# Altium PCB ES_Class6C_2L.PcbDoc
Units mm, origin at the board's own origin, x right, y up, seen from the top; angles counter-clockwise.
Board outline 55 x 55 mm, 2 copper layers (Top Layer, Bottom Layer), stack 1.586 mm thick; 71 components, 24 nets, 188 pads, 107 vias.
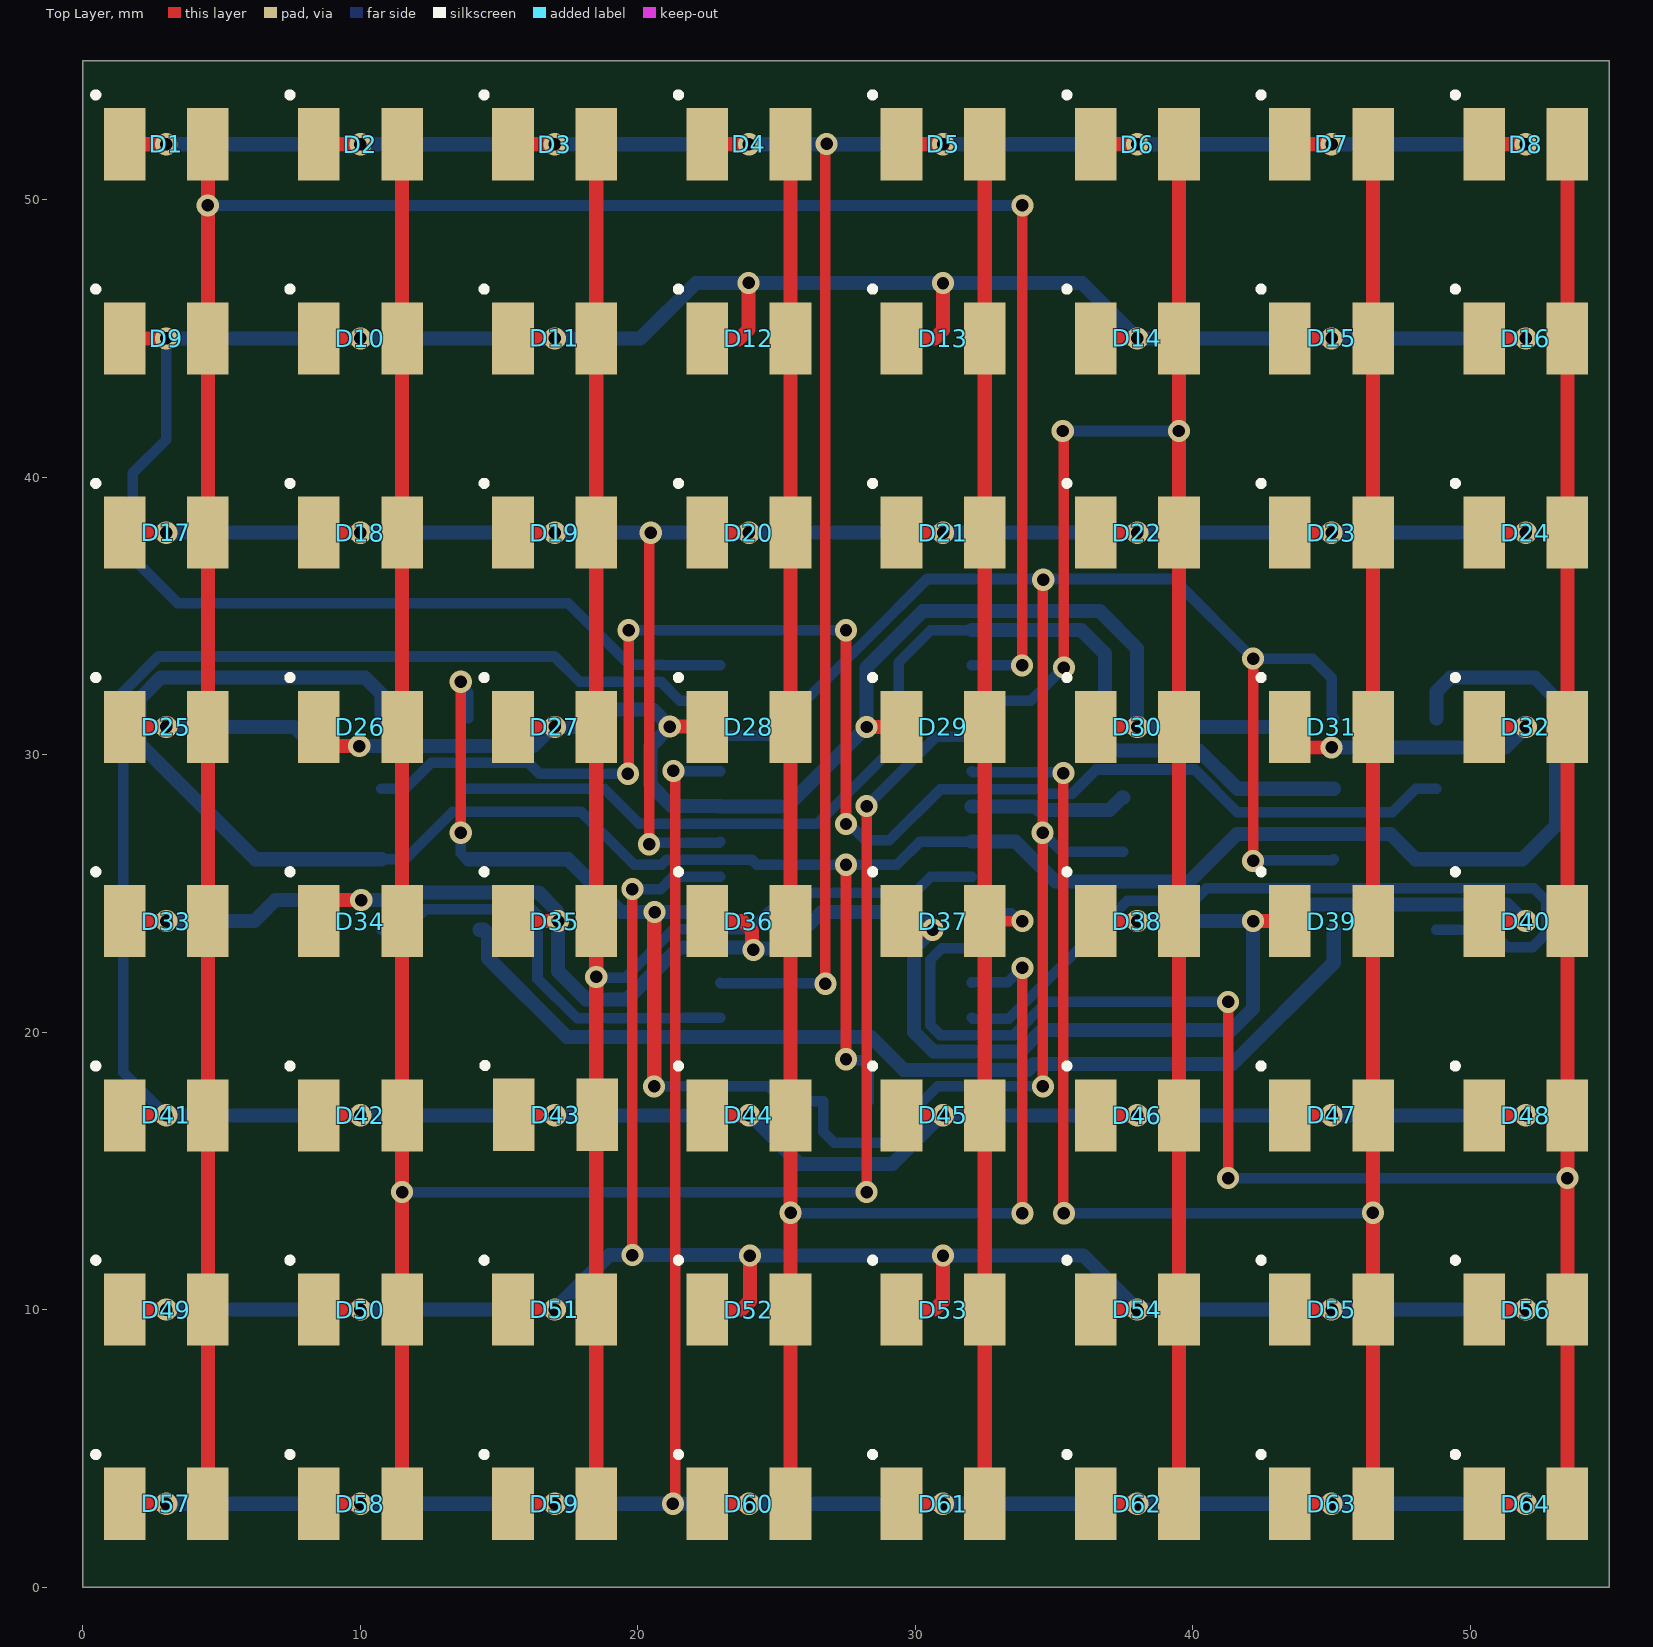
[diagram p0: Top Layer view]
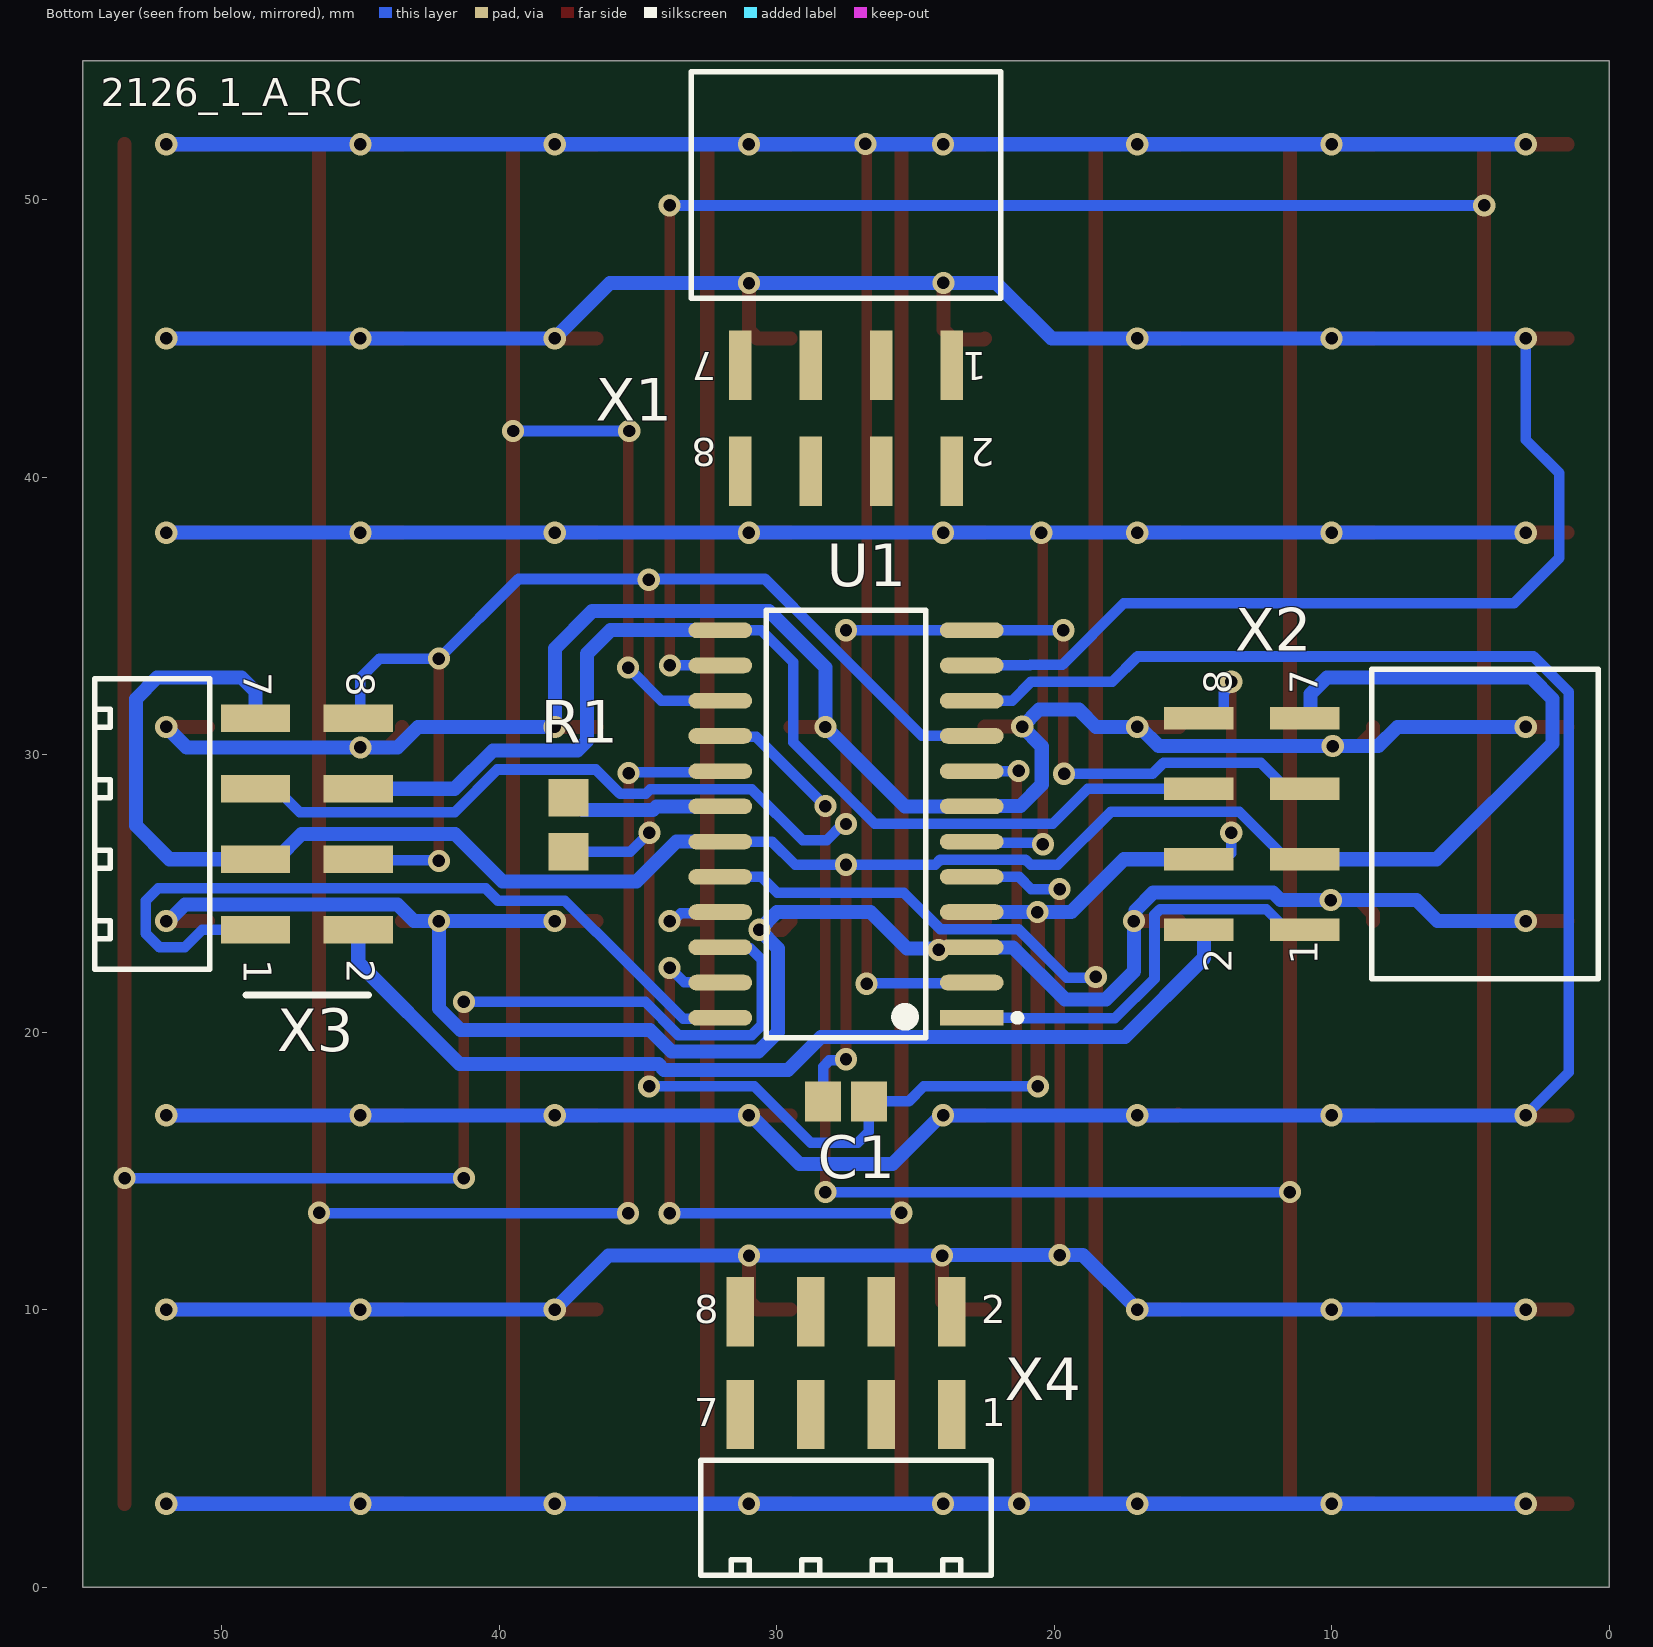
[diagram p1: Bottom Layer view, seen from below]
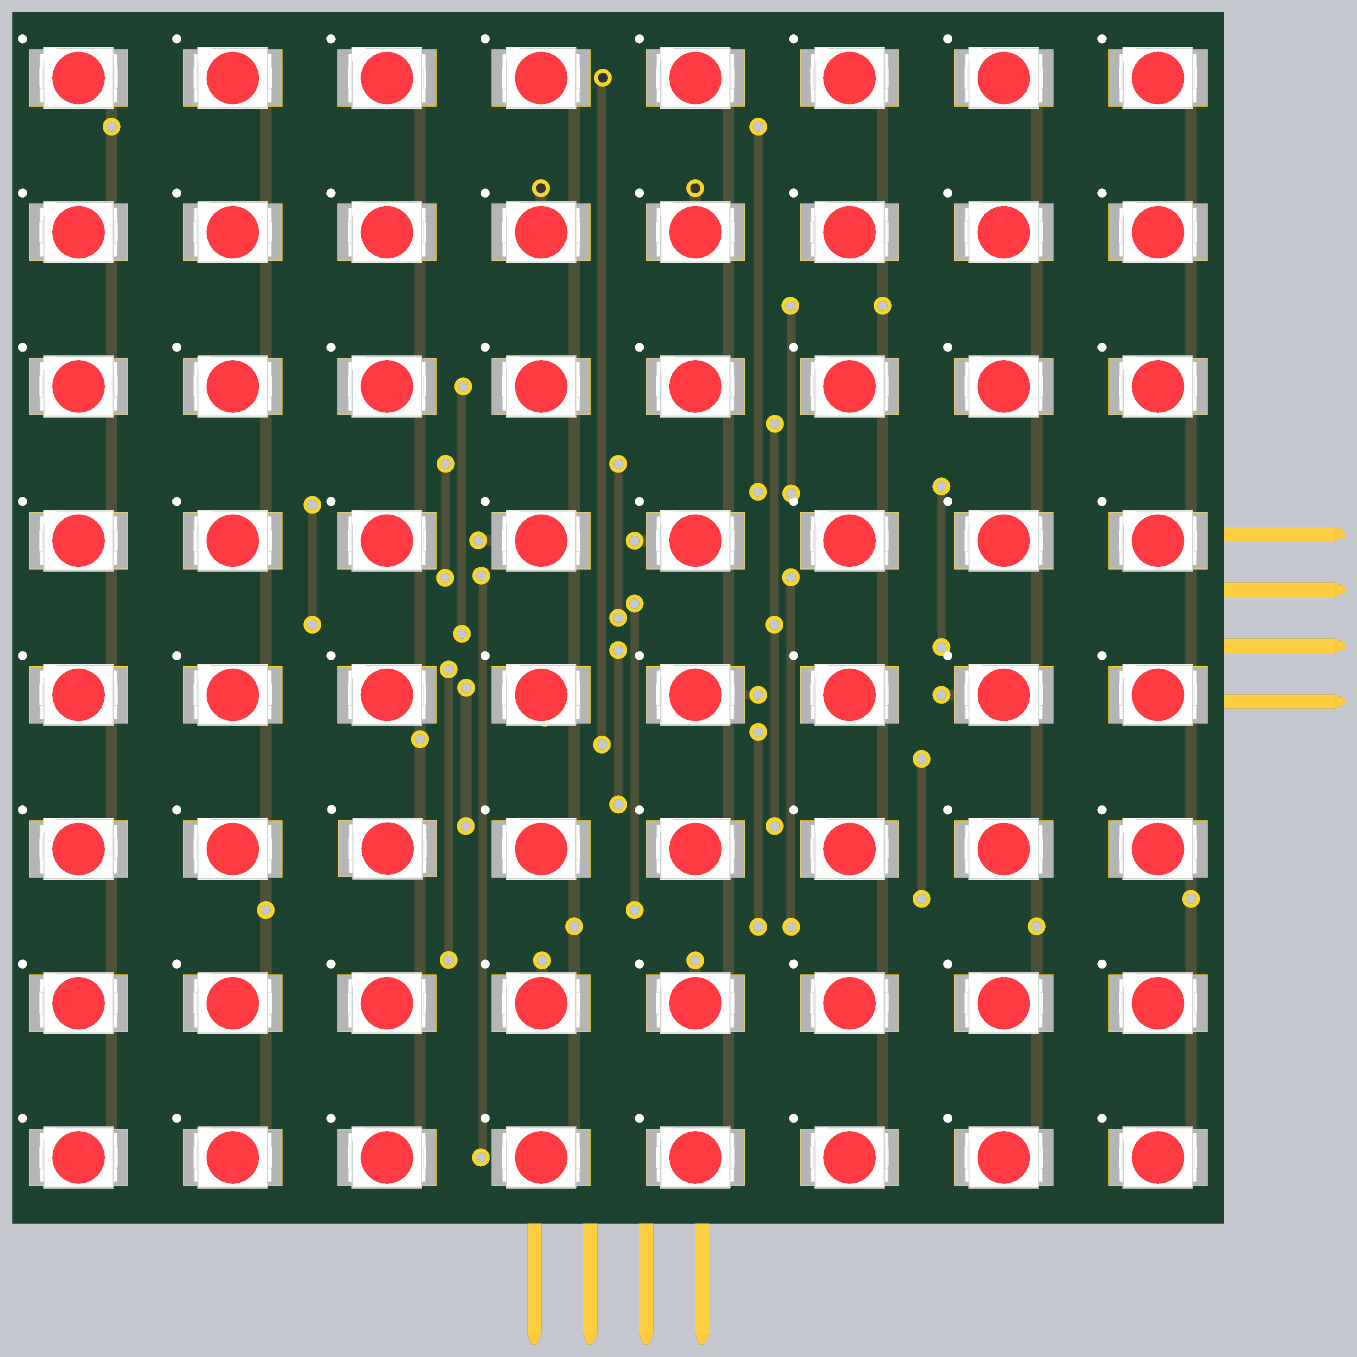
[diagram p2: 3D render of the assembled board from above, using the file's embedded part models]
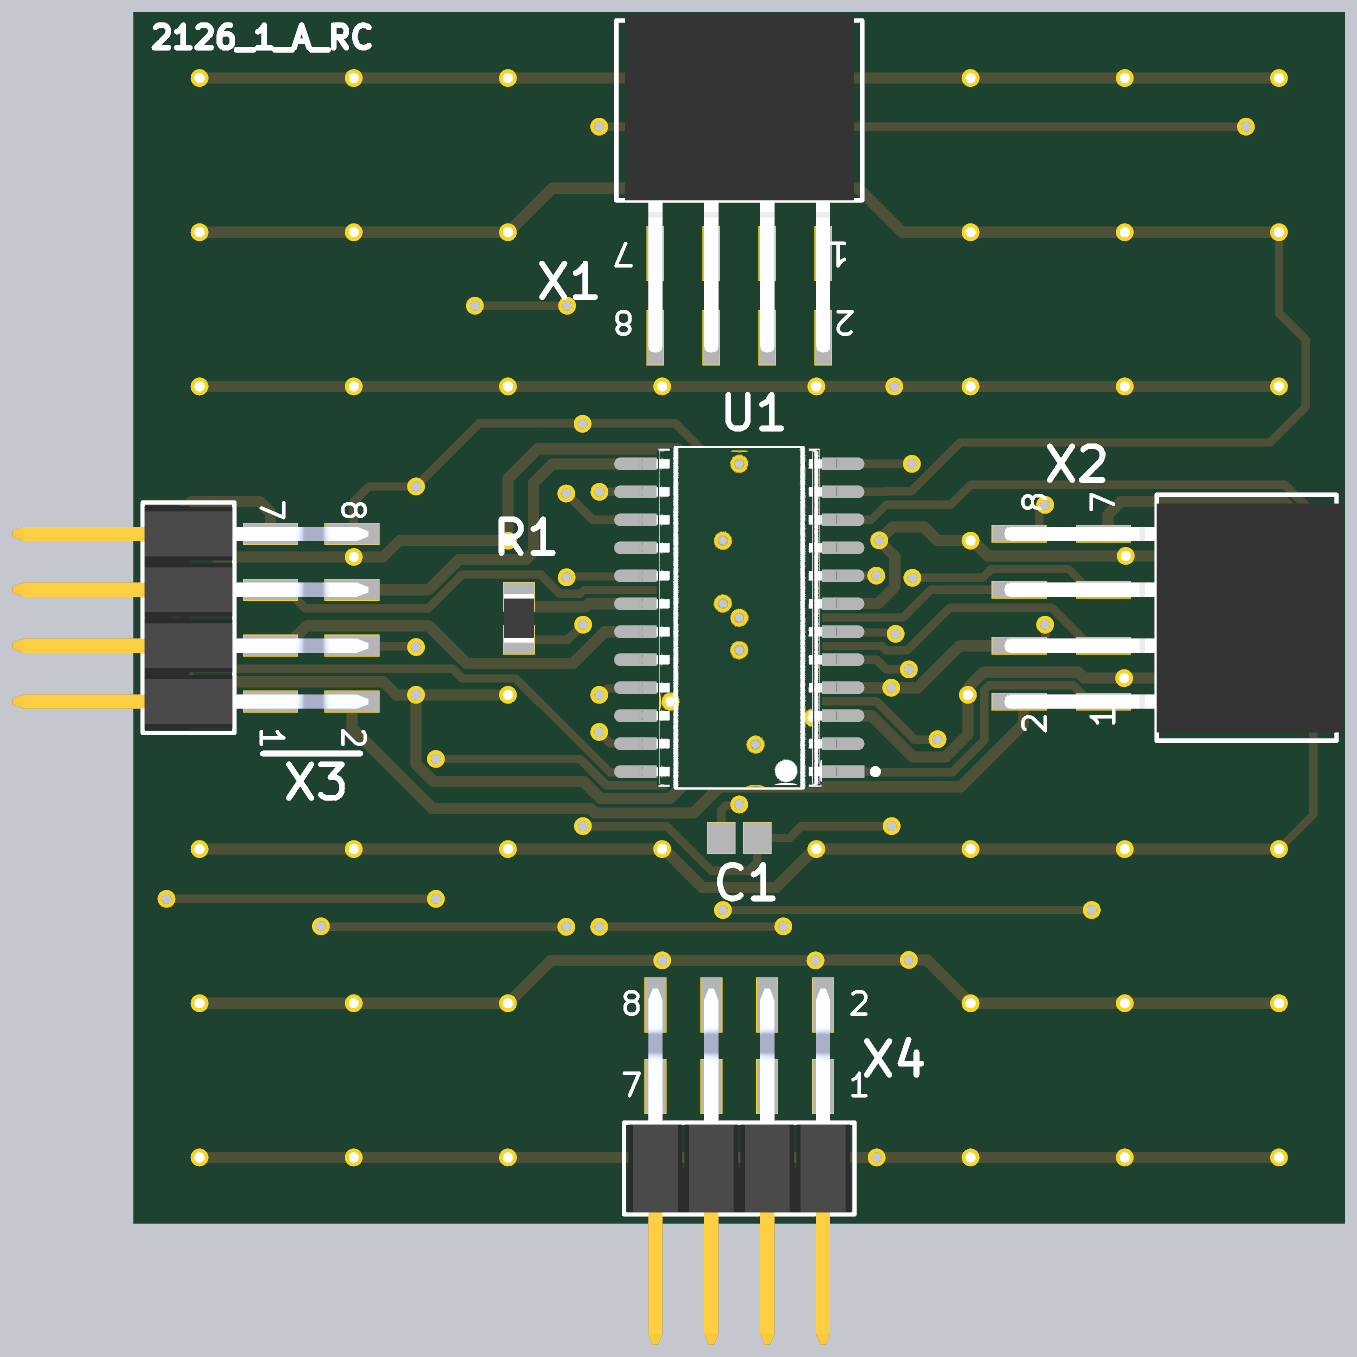
[diagram p3: 3D render of the assembled board from below, using the file's embedded part models]

## Layer stack, top to bottom
Top Solder: solder mask 0.0102, Solder Resist, Dk 3.5
Top Layer: signal copper 0.018
Dielectric1: core 1.55, FR-4, Dk 4.8
Bottom Layer: signal copper 0.018
Bottom Solder: solder mask 0.0102, Solder Resist, Dk 3.5

## Board outline
0,0 0,55 55,55 55,0

## Design rules (kind name [scope] priority, off if disabled: settings)
BoardOutlineClearance [All] p1: gap=0.25 ignorepadtopadclearanceinfootprint=FALSE except(0: Arc-SplitContinuation Track-SplitContinuation SMDPad-SplitContinuation THPad-SplitContinuation Via-SplitContinuation Fill-SplitContinuation Poly-SplitContinuation Region-SplitContinuation Text-SplitContinuation)
Clearance Clearance-xPP-xTP-xTT [All] p1: gap=0.15 ignorepadtopadclearanceinfootprint=FALSE except(0: Arc-Hole Track-Hole SMDPad-Hole THPad-Hole Via-Hole Fill-Hole Poly-Hole Region-Hole Text-Hole)
ComponentClearance [All] p1: gap=0.25 collisioncheckmode=3 verticalgap=0.25 showdistances=FALSE
DiffPairsRouting [All] p1: maxlimit=0.25 minlimit=0.25 mostfreqgap=0.25 toplayer_minwidth=0.381 toplayer_maxwidth=0.381 toplayer_prefwidth=0.381 bottomlayer_minwidth=0.381 bottomlayer_maxwidth=0.381 bottomlayer_prefwidth=0.381 maxuncoupledlength=12.5
Height [All] p1: minheight=0 maxheight=25 prefheight=12.5
HoleSize HoleSize-PTH [All] p1: absolutevalues=TRUE maxlimit=10 minlimit=0.25 maxpercent=80.000 minpercent=20.000
HoleToHoleClearance [All] p1: gap=0.35 allowstackedmicrovias=TRUE
MinimumAnnularRing "Minimum IAR  >0.45mm" [((ObjectKind = 'Pad') OR (ObjectKind = 'Via')) And (Layer = 'MultiLayer') And (HoleDiameter > AsMM(0.45))] p1: minimumring=0.175 // minimum inner annular ring for pads > 0.45mm finished hole size
MinimumAnnularRing "Minimum IAR <=0.45mm" [((ObjectKind = 'Pad') OR (ObjectKind = 'Via')) And (Layer = 'MultiLayer') And (HoleDiameter <= AsMM(0.45))] p2: minimumring=0.175 // minimum inner annular ring for pads <= 0.45mm finished hole size
MinimumSolderMaskSliver [All] p1: minsoldermaskwidth=0.08
PasteMaskExpansion [All] p1: expansion=-0.025
PlaneClearance PlaneClearance-IPI [All] p1: clearance=0.25
PlaneConnect [All] p1: planeconnectstyle=Relief reliefexpansion=0.175 reliefentries=4 reliefconductorwidth=0.2 reliefairgap=0.2
PolygonConnect PolygonConnect-xTW [All] p1: connectstyle=Relief reliefconductorwidth=0.2 reliefentries=4 polygonreliefangle="90 Angle" airgapwidth=0.2
RoomDefinition 2126_1_MatrixBoard_AffichageMatricielNomEtudiant [InComponentClass('2126_1_MatrixBoard_AffichageMatricielNomEtudiant')] p1: confinementstyle=ConfineIn formatcopy=TRUE lockcomponents=FALSE outline -250.5,-211.955 743.085,-211.955 743.085,443.238 -250.5,443.238
RoutingCorners [All] p1: cornerstyle=45-Degree minsetback=2.5 maxsetback=2.5
RoutingVias RoutingViasES [All] p1: holewidth=0.3 width=0.65 viastyle="Through Hole" minholewidth=0.25 minwidth=0.61 maxholewidth=0.45 maxwidth=0.8 // finishet hole size <= 0.45mm
SilkToSilkClearance [All] p1: silktosilkclearance=0.2
SilkToSolderMaskClearance SilkscreenOverComponentPads [IsPad] p1: minsilkscreentomaskgap=0.2 clearancetoexposedcopper=TRUE
SolderMaskExpansion [All] p1: expansion=0 istentingtop=FALSE
UnRoutedNet [All] p1: checkbadconnections=TRUE
Width Width-xTW [All] p1: maxlimit=0.508 minlimit=0.254 preferedwidth=0.381 minimp=50.000000 maximp=50.000000 favimp=50.000000
17 further rules are at their usual default settings.

## Components (designator, comment, footprint, x,y, rotation, side; value= is the part's Value field where it differs from the comment)
C1 "100n" CAPC2013X145X48NL20T23 27.5,17.5 r0 bottom
D1 "RED" SODFL350X210-2N 3,52 r0 top
D2 "RED" SODFL350X210-2N 10,52 r0 top
D3 "RED" SODFL350X210-2N 17,52 r0 top
D4 "RED" SODFL350X210-2N 24,52 r0 top
D5 "RED" SODFL350X210-2N 31,52 r0 top
D6 "RED" SODFL350X210-2N 38,52 r0 top
D7 "RED" SODFL350X210-2N 45,52 r0 top
D8 "RED" SODFL350X210-2N 52,52 r0 top
D9 "RED" SODFL350X210-2N 3,45 r0 top
D10 "RED" SODFL350X210-2N 10,45 r0 top
D11 "RED" SODFL350X210-2N 17,45 r0 top
D12 "RED" SODFL350X210-2N 24,45 r0 top
D13 "RED" SODFL350X210-2N 31,45 r0 top
D14 "RED" SODFL350X210-2N 38,45 r0 top
D15 "RED" SODFL350X210-2N 45,45 r0 top
D16 "RED" SODFL350X210-2N 52,45 r0 top
D17 "RED" SODFL350X210-2N 3,38 r0 top
D18 "RED" SODFL350X210-2N 10,38 r0 top
D19 "RED" SODFL350X210-2N 17,38 r0 top
D20 "RED" SODFL350X210-2N 24,38 r0 top
D21 "RED" SODFL350X210-2N 31,38 r0 top
D22 "RED" SODFL350X210-2N 38,38 r0 top
D23 "RED" SODFL350X210-2N 45,38 r0 top
D24 "RED" SODFL350X210-2N 52,38 r0 top
D25 "RED" SODFL350X210-2N 3,31 r0 top
D26 "RED" SODFL350X210-2N 10,31 r0 top
D27 "RED" SODFL350X210-2N 17,31 r0 top
D28 "RED" SODFL350X210-2N 24,31 r0 top
D29 "RED" SODFL350X210-2N 31,31 r0 top
D30 "RED" SODFL350X210-2N 38,31 r0 top
D31 "RED" SODFL350X210-2N 45,31 r0 top
D32 "RED" SODFL350X210-2N 52,31 r0 top
D33 "RED" SODFL350X210-2N 3,24 r0 top
D34 "RED" SODFL350X210-2N 10,24 r0 top
D35 "RED" SODFL350X210-2N 17,24 r0 top
D36 "RED" SODFL350X210-2N 24,24 r0 top
D37 "RED" SODFL350X210-2N 31,24 r0 top
D38 "RED" SODFL350X210-2N 38,24 r0 top
D39 "RED" SODFL350X210-2N 45,24 r0 top
D40 "RED" SODFL350X210-2N 52,24 r0 top
D41 "RED" SODFL350X210-2N 3,17 r0 top
D42 "RED" SODFL350X210-2N 10,17 r0 top
D43 "RED" SODFL350X210-2N 17.03,17.021 r0 top
D44 "RED" SODFL350X210-2N 24,17 r0 top
D45 "RED" SODFL350X210-2N 31,17 r0 top
D46 "RED" SODFL350X210-2N 38,17 r0 top
D47 "RED" SODFL350X210-2N 45,17 r0 top
D48 "RED" SODFL350X210-2N 52,17 r0 top
D49 "RED" SODFL350X210-2N 3,10 r0 top
D50 "RED" SODFL350X210-2N 10,10 r0 top
D51 "RED" SODFL350X210-2N 17,10 r0 top
D52 "RED" SODFL350X210-2N 24,10 r0 top
D53 "RED" SODFL350X210-2N 31,10 r0 top
D54 "RED" SODFL350X210-2N 38,10 r0 top
D55 "RED" SODFL350X210-2N 45,10 r0 top
D56 "RED" SODFL350X210-2N 52,10 r0 top
D57 "RED" SODFL350X210-2N 3,3 r0 top
D58 "RED" SODFL350X210-2N 10,3 r0 top
D59 "RED" SODFL350X210-2N 17,3 r0 top
D60 "RED" SODFL350X210-2N 24,3 r0 top
D61 "RED" SODFL350X210-2N 31,3 r0 top
D62 "RED" SODFL350X210-2N 38,3 r0 top
D63 "RED" SODFL350X210-2N 45,3 r0 top
D64 "RED" SODFL350X210-2N 52,3 r0 top
R1 "43k" RESC2013X70X40ML20T20 37.5,27.475 r90 bottom value=10k
U1 "MAX7221CWG+" FP-W24-1-IPC_B 27.5,27.5 r0 bottom
X1 "610108249221" 610108249221 27.5,50.8 r0 bottom
X2 "610108249221" 610108249221 4.2,27.5 r90 bottom
X3 "610108249121" 610108249121 52.5,27.5 r270 bottom
X4 "610108249121" 610108249121 27.5,2.5 r180 bottom

## Footprints (in the part's own frame and the unit in brackets; to place one, negate y for a bottom-side part, rotate by r counter-clockwise, add the part's x,y. Pads: shape width x height; smd on the part's side, far side on the other; paste and mask are expansions set on the pad)
610108249121 [mm] "Pin Header, pitch 2.54 mm, SMD, Angled, dual row, 8p"
  rect 1x2.5 smd: 1(3.81,3.72) 2(3.81,7.42) 3(1.27,3.72) 4(1.27,7.42) 5(-1.27,3.72) 6(-1.27,7.42) 7(-3.81,3.72) 8(-3.81,7.42)
  silkscreen extent -5.23,-2.07 5.23,2.07, body extent -5.08,-8 5.08,8.16, height 5.1
610108249221 [mm] "Socket Header, Pitch 2.54 mm, SMT, Angled, dual row, 8p"
  rect 0.8x2.5 smd: 1(-3.81,6.76) 2(-3.81,10.59) 3(-1.27,6.76) 4(-1.27,10.59) 5(1.27,6.76) 6(1.27,10.59) 7(3.81,6.76) 8(3.81,10.59)
  silkscreen extent -5.58,-3.81 5.58,4.35, body extent -5.22,-4.15 5.2,11.25, height 5.03
CAPC2013X145X48NL20T23 [mm] "Chip Capacitor, 2-Leads, Body 2.00x1.25mm, IPC Medium Density"
  rect 1.3x1.45 smd: 1(-0.825,0) 2(0.825,0)
  body extent -1.1,-0.72 1.1,0.72, height 1.45
FP-W24-1-IPC_B [mm]
  rect 2.298x0.567 smd paste+0 mask+0: 1(-4.528,6.985)
  rrect100% 2.298x0.567 smd paste+0 mask+0: 2(-4.528,5.715) 3(-4.528,4.445) 4(-4.528,3.175) 5(-4.528,1.905) 6(-4.528,0.635) 7(-4.528,-0.635) 8(-4.528,-1.905) 9(-4.528,-3.175) 10(-4.528,-4.445) 11(-4.528,-5.715) 12(-4.528,-6.985) 13(4.528,-6.985) 14(4.528,-5.715) 15(4.528,-4.445) 16(4.528,-3.175) 17(4.528,-1.905) 18(4.528,-0.635) 19(4.528,0.635) 20(4.528,1.905) 21(4.528,3.175) 22(4.528,4.445) 23(4.528,5.715) 24(4.528,6.985)
  silkscreen extent -6.3,-7.7 2.88,7.7, body extent -5.16,-7.7 5.16,7.7, height 2.66
RESC2013X70X40ML20T20 [mm] "Chip Resistor, 2-Leads, Body 2.2x1.35mm, IPC Low Density"
  rect 1.35x1.45 smd: 1(-0.975,0) 2(0.975,0)
  body extent -1.1,-0.68 1.1,0.67, height 0.7
SODFL350X210-2N [mm] "SODFL, 2-Leads, Body 3,00x3,50mm, IPC Medium Density"
  rect 1.5x2.6 smd: A(1.5,0) K(-1.5,0)
  silkscreen extent -2.64,1.68 -2.44,1.88, body extent -1.78,-1.4 1.78,1.4, height 1.8

## Part data
C1: library part CMP-2007-03167-1, "VJ0805Y104KNAAT", Manufacturer=Vitramon, Manufacturer 1="Vishay Vitramon", Manufacturer Part Number 1=VJ0805Y104KNAAT, Part Number=VJ0805Y104KNAAT
D1 D2 D3 D4 D5 D6 D7 D8 D9 D10 D11 D12 D13 D14 D15 D16 D17 D18 D19 D20 D21 D22 D23 D24 D25 D26 D27 D28 D29 D30 D31 D32 D33 D34 D35 D36 D37 D38 D39 D40 D41 D42 D43 D44 D45 D46 D47 D48 D49 D50 D51 D52 D53 D54 D55 D56 D57 D58 D59 D60 D61 D62 D63 D64: library part 151031VS04000, "WL-TMRC THT Mono-color Round Color, size 3mm, Bright Green, 2.1V, 40deg", Emitting Color="Bright Green", Forward Voltage=2.1V, Operating Temperature="-40 to +85degC", Chip Technology=AlInGaP, ComponentLink1Description=Manufacturer, ComponentLink1URL=http://www.we-online.de, ComponentLink2Description=Datasheet, ComponentLink2URL=https://katalog.we-online.de/led/datasheet/151031VS04000.pdf, Dominant Wavelength=570nm, Luminous Intensity=120mcd, Mounting Technology=THT, Packaging=Bulk, Part Number=151031VS04000, Peak Wavelength=573nm, Published Date="January 2021", Publisher="Wurth Elektronik", Size=3mm, Viewing Angle=40deg
R1: library part CMP-1013-00623-1, "10K 0.125W 1% 0805 (2012 Metric)  SMD", Case-EIA=0805, Case-Metric=2012, Manufacturer 1="Vishay Dale", Manufacturer 2=Yageo, Manufacturer 5=Bourns, Manufacturer 6=Rohm, Manufacturer 7=Vishay, Manufacturer 10=Panasonic, Manufacturer Part Number 1=CRCW080510K0FKEC, Manufacturer Part Number 2=RC0805FR-0710KL, Manufacturer Part Number 3=CRCW080510K0FKTC, Manufacturer Part Number 4=CRCW080510K0FKEB, Manufacturer Part Number 5=CR0805-FX-1002ELF, Manufacturer Part Number 6=MCR10EZPF1002, Manufacturer Part Number 7=CRCW080510K0FKEA, Manufacturer Part Number 8=CRCW080510K0FKTB, Manufacturer Part Number 9=CRCW080510K0FKTA, Manufacturer Part Number 10=ERJ-6ENF1002V, Power="0.125 W", Supplier Part Number 1=541-10.0KCCT-ND, Tolerance="1 %", Manufacturer 3="Vishay Dale", Manufacturer 4="Vishay Dale", Manufacturer 8="Vishay Dale", Manufacturer 9="Vishay Dale", Supplier 1=Digi-Key, Technology=SMT
U1: library part CMP-05718-000002-1, "IC DRVR 7 SEGMNT 8 DIGIT 24SOIC", Manufacturer="Maxim Integrated", Max Junction Temp=+150°C, Max Power Dissipation=941mW, Max Supply Voltage=5.5V, Min Supply Voltage=4V, Nominal Supply Current=330mA, Package=W24-1, Temperature="0°C to +70°C", Temperature Range High=+70°C, Temperature Range Low=0°C, Automotive=No, Category=IC, ComponentLink2Description=Datasheet, ComponentLink2URL=https://datasheets.maximintegrated.com/en/ds/MAX7219-MAX7221.pdf, Device Class L1="Integrated Circuits (ICs)", Device Class L2="Power Management ICs", Device Class L3="LED Drivers", Digikey Description="IC DRVR 7 SEGMNT 8 DIGIT 24SOIC", Footprint Url=https://pdfserv.maximintegrated.com/land_patterns/90-0182.PDF, Height=2.65mm, Ipc Land Pattern Name=SOIC127P1032X250-24, Lead Free=Yes, Manufacturer Part Number=MAX7221CWG+, Mouser Description="In a Tube of 30, Maxim MAX7221CWG+, LED Driver, 8-Digits 64-Segments, 5 V, 24-Pin SOIC W", Number Of Outputs=8, Octopart=https://octopart.com/max7221cwg%2B-maxim+integrated-39581478, RoHS=TRUE, Standoff Height=0.1mm
X1 X2: "WR-PHD Socket Header, THT, pitch 2.54mm, Dual Row, Angled, 8p", Contact Resistance=20mOhm, Manufacturer="Wurth Elektronik", Manufacturer Part Number=613008243121, Operating Temperature="-40 to +125degC", Rated Current=3A, Withstanding Voltage=500VAC, Working Voltage=250VAC, ComponentLink1Description=Manufacturer, ComponentLink1URL=http://www.we-online.de, ComponentLink2Description=Datasheet, ComponentLink2URL=https://www.we-online.com/catalog/datasheet/613008243121.pdf, Gender="Socket Header", Mounting Technology=THT, Orientation=Angled, Packaging=Tray, Pin Number=8, Pitch=2.54mm, Row Number=Dual
X3 X4: "WR-PHD Pin Header, THT, pitch 2.54mm, Dual Row, Angled, 8p", Contact Resistance=20mOhm, Manufacturer="Wurth Elektronik", Manufacturer Part Number=61300821021, Operating Temperature="-40 to +105degC", Rated Current=3A, Withstanding Voltage=500VAC, Working Voltage=250VAC, ComponentLink1Description=Manufacturer, ComponentLink1URL=http://www.we-online.de, ComponentLink2Description=Datasheet, ComponentLink2URL=https://www.we-online.com/catalog/datasheet/61300821021.pdf, Gender="Pin Header", Mounting Technology=THT, Orientation=Angled, Packaging=Bag, Pin Number=8, Pitch=2.54mm, Row Number=Dual

## Via types
v1: diameter 0.8, hole 0.45, Top Layer to Bottom Layer, 107 vias

## Nets (pads, with @x,y where several pads share a name; then routed paths per layer and width w, separated by ;. In a path a pad name is that pad's centre, name@x,y a point inside that pad or via, vN(x,y) a via of type N, cw(c..) or ccw(c..) an arc to the next point about the centre after c; other vN are vias at no path point)
+5: C1.2 U1.19 X2.3 X2.7 X3.3 X3.7 | length 88.3
  Top Layer w0.381: v1(27.5,19.024) v1(27.5,26.03)
  Bottom Layer w0.381: X2.3@10.76,26.23 11.61,26.23 13.328,27.948 17.949,27.948 19.867,26.03 20.847,26.03 21.036,26.219 24.096,26.219 24.285,26.03 v1(27.5,26.03) 29.332,26.03 30.167,26.865 U1.19 ; v1(27.5,19.024) 27.546,18.978 28.102,18.978 28.325,18.755 C1.2
  Bottom Layer w0.508: X2.7@10.755,31.315 10.755,32.187 10.168,32.774 2.802,32.774 2.04,32.012 2.04,30.408 6.218,26.23 X2.3@10.76,26.23 ; U1.19 33.603,26.865 35.047,25.421 39.883,25.421 41.596,27.134 47.126,27.134 48.03,26.23 X3.3 51.884,26.23 53.094,27.44 53.094,32.012 52.332,32.774 49.284,32.774 48.784,32.274 48.784,31.314 X3.7
/SS1: U1.12 X2.5 X3.5 | length 53.1
  Top Layer w0.381: v1(19.641,29.313) 19.663,29.335 v1(19.663,34.485) ; v1(27.5,27.5) v1(27.5,34.485)
  Bottom Layer w0.381: X2.5@10.76,28.77 11.61,28.77 12.551,29.711 16.056,29.711 16.454,29.313 v1(19.641,29.313) ; v1(19.663,34.485) U1.12 v1(27.5,34.485) ; v1(27.5,27.5) 27.613,27.5 28.194,26.919 29.064,26.919 30.904,28.759 34.55,28.759 34.713,28.596 35.644,28.596 36.513,29.465 40.068,29.465 41.604,27.929 47.189,27.929 48.03,28.77 X3.5
DIN: U1.1 X2.1 | length 15.5
  Bottom Layer w0.381: X2.1@10.76,23.69 11.61,23.69 12.351,24.43 16.181,24.43 16.38,24.231 16.38,21.928 17.813,20.495 21.253,20.495 21.273,20.515 U1.1
DOUT: U1.24 X3.1 | length 28.5
  Bottom Layer w0.381: U1.24 32.064,20.479 33.371,20.479 36.503,23.611 36.513,23.611 37.637,24.734 37.637,24.741 40.043,24.741 40.491,25.188 52.293,25.188 52.741,24.741 52.741,23.553 52.242,23.055 51.338,23.055 50.703,23.69 X3.1
GND: C1.1 R1.1 U1.4 U1.9 X2.4 X2.8 X3.4 X3.8 | length 99.5
  Top Layer w0.381: v1(13.615,27.186) v1(13.615,32.624) ; v1@34.587,36.281 v1(34.587,27.186) 34.598,27.175 v1@34.598,18.043 ; v1(42.172,26.17) v1(42.172,33.46)
  Top Layer w0.508: v1(20.582,18.042) 20.591,18.051 20.591,24.316 v1(20.599,24.325)
  Bottom Layer w0.381: v1(13.615,27.186) 13.615,26.44 13.824,26.23 X2.4@13.89,26.23 ; v1(13.615,32.624) 13.615,32.511 13.89,32.235 X2.8@13.89,31.31 ; v1(20.582,18.042) 24.696,18.042 25.238,17.5 C1.1 26.683,17.492 26.683,16.407 27.08,16.01 28.769,16.01 30.801,18.042 v1(34.597,18.042) ; U1.9 24.765,30.675 28.319,34.229 30.42,36.33 34.587,36.33 v1(34.611,36.305) 34.636,36.33 39.302,36.33 v1(42.172,33.46) 44.314,33.46 45,32.774 45,31.39 X3.8 ; v1(34.587,27.186) 34.589,27.186 35.275,26.5 R1.1 ; v1(42.172,26.17) 42.202,26.2 45.05,26.2 X3.4
  Bottom Layer w0.508: X2.4@13.89,26.23 17.476,26.23 19.381,24.325 v1(20.599,24.325) U1.4
LINE0: D1.K D2.K D3.K D4.K D5.K D6.K D7.K D8.K U1.2 | length 95.1
  Top Layer w0.381: v1(26.759,21.745) 26.759,51.97 v1(26.8,52.011)
  Top Layer w0.508: D1.K v1(3,52) ; D2.K v1(10,52) ; D3.K v1(17,52) ; D4.K v1(24,52) ; D5.K v1(31,52) ; D6.K v1(38,52) ; D7.K v1(45,52) ; D8.K v1(52,52)
  Bottom Layer w0.381: U1.2 22.992,21.765 26.739,21.765 v1(26.759,21.745)
  Bottom Layer w0.508: v1(3,52) v1(10,52) v1(17,52) v1(24,52) v1(31,52) v1(38,52) v1(45,52) v1(52,52)
LINE1: D9.K D10.K D11.K D12.K D13.K D14.K D15.K D16.K U1.11 | length 97.5
  Top Layer w0.508: D9.K v1(3,45) ; D10.K v1(10,45) ; D11.K v1(17,45) ; D12.K 22.534,44.966 23.63,44.966 23.991,45.327 v1(23.991,47.001) ; D13.K 30.698,45 30.996,45.298 v1(30.996,46.998) ; D14.K v1(38,45) ; D15.K v1(45,45) ; D16.K v1(52,45)
  Bottom Layer w0.381: v1(3,45) 3,41.354 1.786,40.14 1.786,37.092 3.424,35.454 17.484,35.454 19.699,33.239 20.848,33.239 20.872,33.215 U1.11
  Bottom Layer w0.508: v1(3,45) v1(10,45) v1(17,45) 20.086,45 22.087,47.001 v1(23.991,47.001) 23.993,47 30.994,47 v1(30.996,46.998) 36.002,46.998 v1(38,45) v1(45,45) v1(52,45)
LINE2: D17.K D18.K D19.K D20.K D21.K D22.K D23.K D24.K U1.6 | length 74.9
  Top Layer w0.381: v1(20.403,26.771) 20.403,37.941 v1(20.462,38)
  Top Layer w0.508: D17.K v1(3,38) ; D18.K v1(10,38) ; D19.K v1(17,38) ; D20.K v1(24,38) ; D21.K v1(31,38) ; D22.K v1(38,38) ; D23.K v1(45,38) ; D24.K v1(52,38)
  Bottom Layer w0.381: v1(20.403,26.771) 20.462,26.829 22.936,26.829 U1.6
  Bottom Layer w0.508: v1(3,38) v1(10,38) v1(31,38) v1(38,38) v1(45,38) v1(52,38)
LINE3: D25.K D26.K D27.K D28.K D29.K D30.K D31.K D32.K U1.7 | length 73.9
  Top Layer w0.508: D25.K v1(3,31) ; D26.K 8.5,30.802 8.996,30.306 v1(9.956,30.306) ; D27.K v1(17,31) ; v1(21.145,31.013) 22.487,31.013 D28.K ; v1(28.24,30.996) 29.496,30.996 D29.K ; D30.K v1(38,31) ; D31.K 43.5,30.756 43.996,30.26 v1(45,30.26) ; D32.K v1(52,31)
  Bottom Layer w0.508: v1(3,31) 7.624,31 8.318,30.306 v1(9.956,30.306) 16.227,30.306 16.921,31 v1(17,31) 18.489,31 19.11,31.621 20.538,31.621 v1(21.145,31.013) 21.145,30.997 20.445,30.296 20.445,28.917 21.216,28.145 22.962,28.145 U1.7 25.379,28.135 v1(28.24,30.996) ; v1@28.24,31.034 28.24,33.14 30.273,35.172 36.647,35.172 37.992,33.827 37.992,31.008 v1(38,31) 42.93,31 43.67,30.26 v1(45,30.26) ; v1@45.135,30.26 51.26,30.26 v1(52,31)
LINE4: D33.K D34.K D35.K D36.K D37.K D38.K D39.K D40.K U1.3 | length 80.3
  Top Layer w0.508: D33.K v1(3,24) ; D34.K 8.5,24.263 8.996,24.759 v1(10.029,24.759) ; D35.K v1(17.121,24) ; D36.K 23.768,24 24.109,23.659 24.109,23.02 v1(24.165,22.964) ; D37.K 29.81,23.69 v1(30.623,23.69) ; D38.K v1(38,24) ; v1(42.172,24) D39.K ; D40.K v1(52,24)
  Bottom Layer w0.508: v1(3,24) 6.18,24 6.939,24.759 v1(10.029,24.759) 11.839,24.759 12.104,25.025 16.427,25.025 17.065,24.387 v1@17.065,24.079 ; v1(17.121,24) 17.121,22.194 18.133,21.182 19.604,21.182 21.477,23.055 U1.3 ; U1.3@22.975,23.052 22.983,23.044 24.006,23.044 24.086,22.964 v1(24.165,22.964) ; v1@24.194,23.02 25.306,23.02 26.611,24.325 29.988,24.325 v1(30.623,23.69) 29.944,23.011 29.944,20.01 30.658,19.297 33.784,19.297 34.558,20.07 41.389,20.07 42.172,20.854 v1(42.172,24) ; v1(38,24) v1(42.172,24) ; v1(52,24) 51.921,24 51.327,24.594 43.663,24.594 43.069,24 v1(42.172,24)
LINE5: D41.K D42.K D43.K D44.K D45.K D46.K D47.K D48.K U1.10 | length 101
  Top Layer w0.508: D41.K v1(3,17) ; D42.K v1(10,17) ; D43.K 15.551,17 v1(17,17) ; D44.K v1(24,17) ; D45.K v1(31,17) ; D46.K v1(38,17) ; D47.K v1(45,17) ; D48.K v1(52,17)
  Bottom Layer w0.381: v1(3,17) 1.445,18.554 1.445,32.258 2.723,33.536 16.993,33.536 17.905,32.624 20.832,32.624 21.511,31.945 U1.10
  Bottom Layer w0.508: v1(3,17) v1(10,17) v1(17,17) 24.079,17 25.831,15.248 29.169,15.248 30.921,17 v1(38,17) v1(45,17) v1(52,17)
LINE6: D49.K D50.K D51.K D52.K D53.K D54.K D55.K D56.K U1.5 | length 82.8
  Top Layer w0.381: v1(19.8,11.966) v1(19.8,25.154)
  Top Layer w0.508: D49.K v1(3,10) ; D50.K v1(10,10) ; D51.K v1(17,10) ; D52.K 23.735,10 24.033,10.298 24.033,11.961 v1@24.038,11.966 ; D53.K 30.698,10 30.996,10.298 v1(30.996,11.946) ; D54.K v1(38,10) ; D55.K v1(45,10) ; D56.K v1(52,10)
  Bottom Layer w0.381: v1(19.8,25.154) 20.823,25.154 21.264,25.595 U1.5
  Bottom Layer w0.508: v1(3,10) v1(10,10) v1(17,10) 18.966,11.966 v1(19.8,11.966) v1@24.038,11.966 ; v1(24.038,11.946) v1(30.996,11.946) 36.054,11.946 v1(38,10) v1(45,10) v1(52,10)
LINE7: D57.K D58.K D59.K D60.K D61.K D62.K D63.K D64.K U1.8 | length 89.2
  Top Layer w0.381: v1(21.264,3) 21.344,3.08 21.344,29.35 v1(21.281,29.413)
  Top Layer w0.508: D57.K v1(3,3) ; D58.K v1(10,3) ; D59.K v1(17,3) ; D60.K v1(24,3) ; D61.K v1(31,3) ; D62.K v1(38,3) ; D63.K v1(45,3) ; D64.K v1(52,3)
  Bottom Layer w0.381: v1(21.281,29.413) 21.285,29.409 22.968,29.409 U1.8
  Bottom Layer w0.508: v1(3,3) v1(10,3) v1(17,3) v1(21.264,3) v1(24,3) v1(31,3) v1(38,3) v1(45,3) v1(52,3)
MISO: X2.2 X3.2 | length 36.2
  Bottom Layer w0.508: X2.2@14.296,23.69 14.444,23.69 14.59,23.544 14.59,22.678 17.44,19.828 28.399,19.828 29.588,18.639 34.057,18.639 34.264,18.846 41.426,18.846 45.08,22.5 X3.2
NetR1_2: R1.2 U1.18 | length 5.7
  Bottom Layer w0.508: U1.18 34.333,28.135 34.466,28.002 37.002,28.002 37.45,28.45 R1.2
ROW0: D1.A D9.A D17.A D25.A D33.A D41.A D49.A D57.A U1.14 | length 96.8
  Top Layer w0.381: v1(33.846,33.215) 33.852,33.22 33.852,49.787 v1(33.857,49.792)
  Top Layer w0.508: D57.A D49.A D41.A D33.A D25.A D17.A D9.A v1(4.5,49.792) D1.A
  Bottom Layer w0.381: v1(4.5,49.792) v1(33.857,49.792) ; U1.14 v1(33.846,33.215)
ROW1: D2.A D10.A D18.A D26.A D34.A D42.A D50.A D58.A U1.16 | length 84.5
  Top Layer w0.381: v1(28.24,14.232) v1(28.24,28.146)
  Top Layer w0.508: D58.A D50.A v1(11.5,14.232) D42.A D34.A D26.A D18.A D10.A D2.A
  Bottom Layer w0.381: v1(11.5,14.232) v1(28.24,14.232) ; v1(28.24,28.146) 30.742,30.648 32.001,30.648 U1.16
ROW2: D3.A D11.A D19.A D27.A D35.A D43.A D51.A D59.A U1.20 | length 64
  Top Layer w0.508: D59.A D51.A v1(18.5,21.986) D35.A D27.A D19.A D11.A D3.A
  Bottom Layer w0.381: v1(18.5,21.986) 18.523,21.963 19.544,21.963 21.282,23.701 24.096,23.701 25.42,25.025 29.98,25.025 30.55,25.595 U1.20
ROW3: D4.A D12.A D20.A D28.A D36.A D44.A D52.A D60.A U1.23 | length 68.3
  Top Layer w0.381: 33.856,16.796 33.856,19.928 ; v1(33.857,13.47) 33.857,16.795 ; 33.857,19.929 v1(33.857,22.315)
  Top Layer w0.508: D60.A D52.A v1(25.5,13.491) D44.A D36.A D20.A D12.A D4.A
  Bottom Layer w0.381: v1(25.5,13.491) 25.521,13.47 v1(33.857,13.47) ; U1.23 32.035,21.792 33.334,21.792 v1(33.857,22.315)
ROW4: D5.A D13.A D21.A D29.A D37.A D45.A D53.A D61.A U1.21 | length 52.3
  Top Layer w0.381: D37.A v1(33.857,24)
  Top Layer w0.508: D61.A D53.A D45.A D37.A D29.A D21.A D13.A D5.A
  Bottom Layer w0.381: U1.21 32.064,24.289 33.454,24.289 33.744,24 v1(33.857,24)
ROW5: D6.A D14.A D22.A D30.A D38.A D46.A D54.A D62.A U1.15 | length 65.5
  Top Layer w0.381: v1(35.314,41.664) 35.352,41.626 v1(35.352,33.14)
  Top Layer w0.508: D62.A D54.A D46.A D38.A D30.A D22.A v1(39.5,41.664) D14.A D6.A
  Bottom Layer w0.381: U1.15 34.157,31.945 v1(35.352,33.14) ; v1(35.314,41.664) v1(39.5,41.664)
ROW6: D7.A D15.A D23.A D31.A D39.A D47.A D55.A D63.A U1.17 | length 79.3
  Top Layer w0.381: v1@35.337,13.485 v1(35.337,29.337)
  Top Layer w0.508: D63.A D55.A D47.A D39.A D31.A D23.A D15.A D7.A
  Bottom Layer w0.381: U1.17 32.062,29.371 35.303,29.371 v1(35.337,29.337) ; v1(35.352,13.47) 46.468,13.47 v1(46.49,13.491)
ROW7: D8.A D16.A D24.A D32.A D40.A D48.A D56.A D64.A U1.22 | length 83
  Top Layer w0.381: v1(41.271,14.74) v1(41.271,21.09)
  Top Layer w0.508: D64.A D56.A v1(53.5,14.74) D48.A D40.A D32.A D24.A D16.A D8.A
  Bottom Layer w0.381: U1.22 31.992,23.019 30.954,23.019 30.539,22.604 30.539,20.257 30.904,19.891 33.538,19.891 34.737,21.09 v1(41.271,21.09) ; v1(41.271,14.74) v1(53.5,14.74)
SCK1: U1.13 X2.6 X3.6 | length 40.5
  Bottom Layer w0.381: X2.6@13.89,28.77 18.793,28.77 20.052,27.511 26.464,27.511 29.396,30.443 29.396,33.329 30.552,34.485 U1.13
  Bottom Layer w0.508: U1.13 35.988,34.485 36.838,33.635 36.838,30.488 37.176,30.15 40.224,30.15 41.604,28.77 X3.6
pads on no net: X1.1 X1.2 X1.3 X1.4 X1.5 X1.6 X1.7 X1.8 X4.1 X4.2 X4.3 X4.4 X4.5 X4.6 X4.7 X4.8

## Silkscreen, mask and mechanical layers (free items; w line width, h text height)
Bottom Overlay:
  lines w0.254: 44.704,21.336 49.121,21.336
  text "2126_1_A_RC" at 54.356,53.365 h1.02
Board Outline (ES):
  the board outline again, w0.254

## Text inside footprints (layer, text, board x,y; h text height)
X1: Bottom Overlay "1" at 22.43,44.5 h1.02 r180; Bottom Overlay "2" at 22.13,41.4 h1.02 r180; Bottom Overlay "7" at 32.17,44.5 h1.02 r180; Bottom Overlay "8" at 32.17,41.4 h1.02 r180
X2: Bottom Overlay "8" at 13.6,32.17 h1.02 r270; Bottom Overlay "7" at 10.5,32.17 h1.02 r270; Bottom Overlay "2" at 13.6,22.13 h1.02 r270; Bottom Overlay "1" at 10.5,22.43 h1.02 r270
X3: Bottom Overlay "2" at 45.5,22.63 h1.02 r90; Bottom Overlay "1" at 49.2,22.63 h1.02 r90; Bottom Overlay "8" at 45.5,32.97 h1.02 r90; Bottom Overlay "7" at 49.2,32.97 h1.02 r90
X4: Bottom Overlay "7" at 32.97,5.8 h1.02; Bottom Overlay "8" at 32.97,9.5 h1.02; Bottom Overlay "1" at 22.63,5.8 h1.02; Bottom Overlay "2" at 22.63,9.5 h1.02